# Altium PCB Anchor.PcbDoc
Units mm, origin at the board's own origin, x right, y up, seen from the top; angles counter-clockwise.
Board outline 60 x 60 mm, 4 copper layers (Top Layer, Layer 2, Layer 3, Bottom Layer), stack 0.568 mm thick; 43 components, 31 nets, 206 pads, 73 vias.
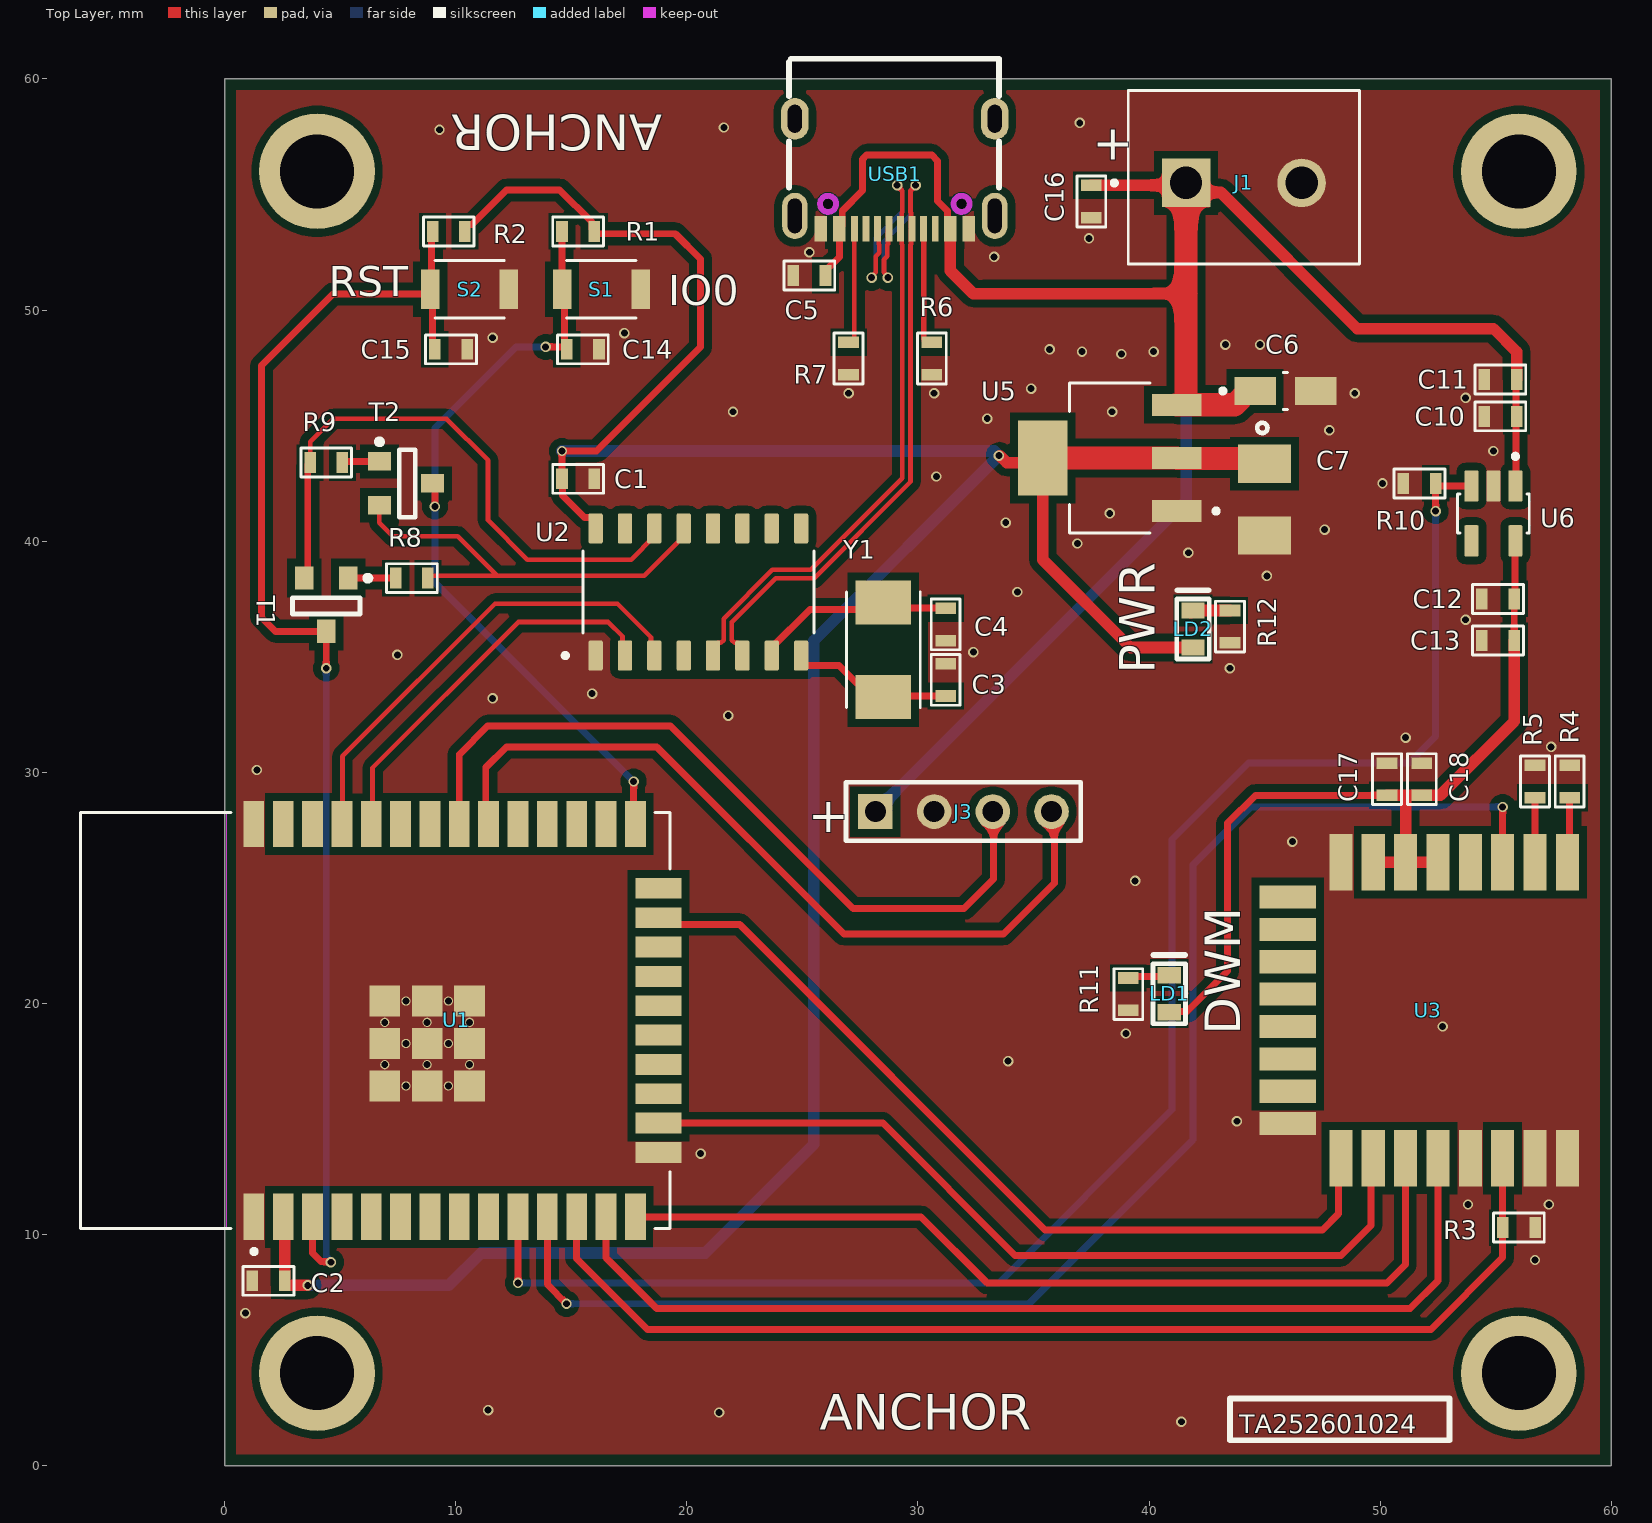
[diagram p0: Top Layer view]
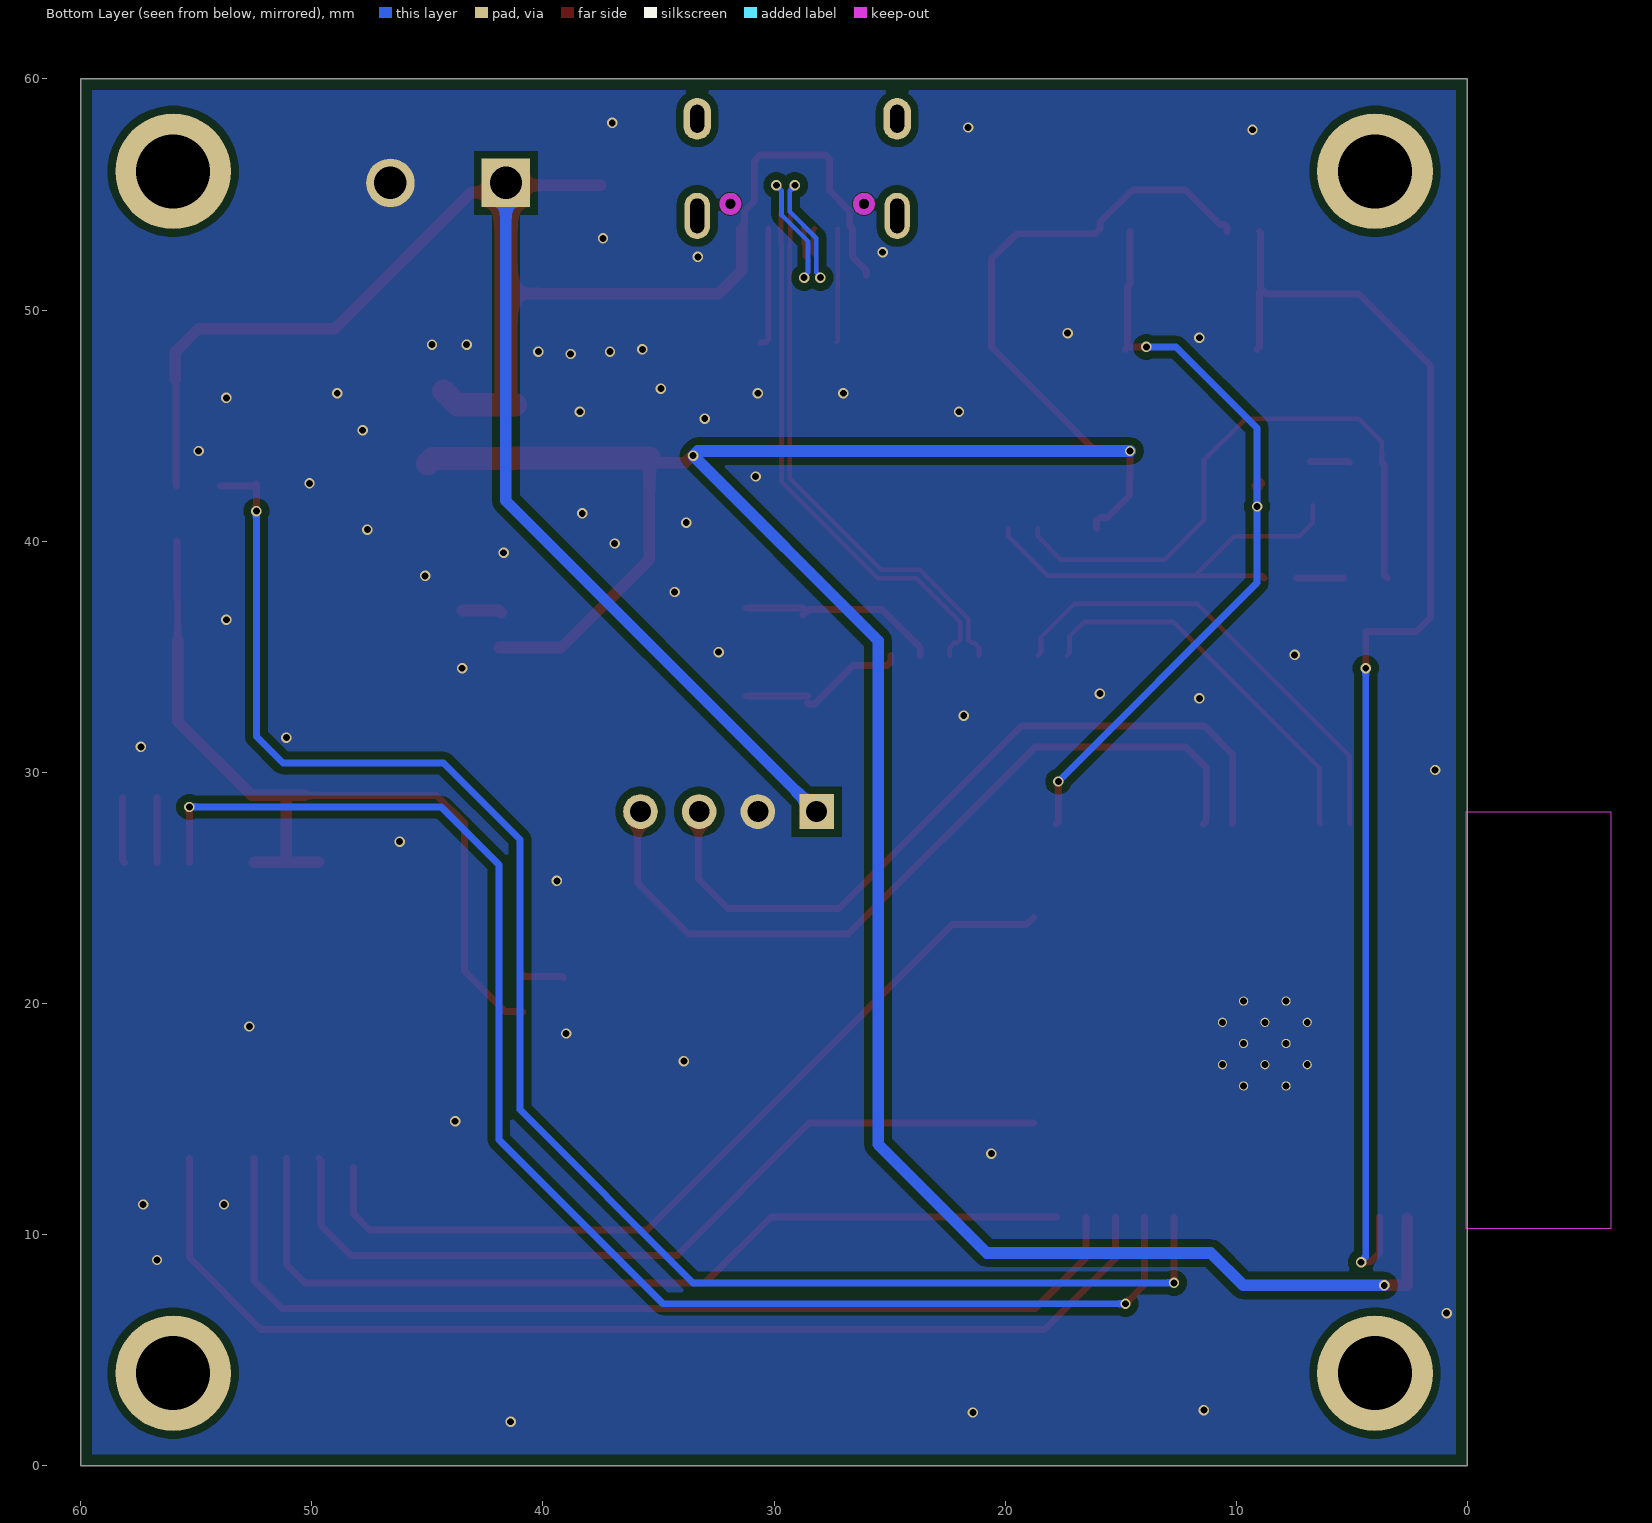
[diagram p1: Bottom Layer view, seen from below]
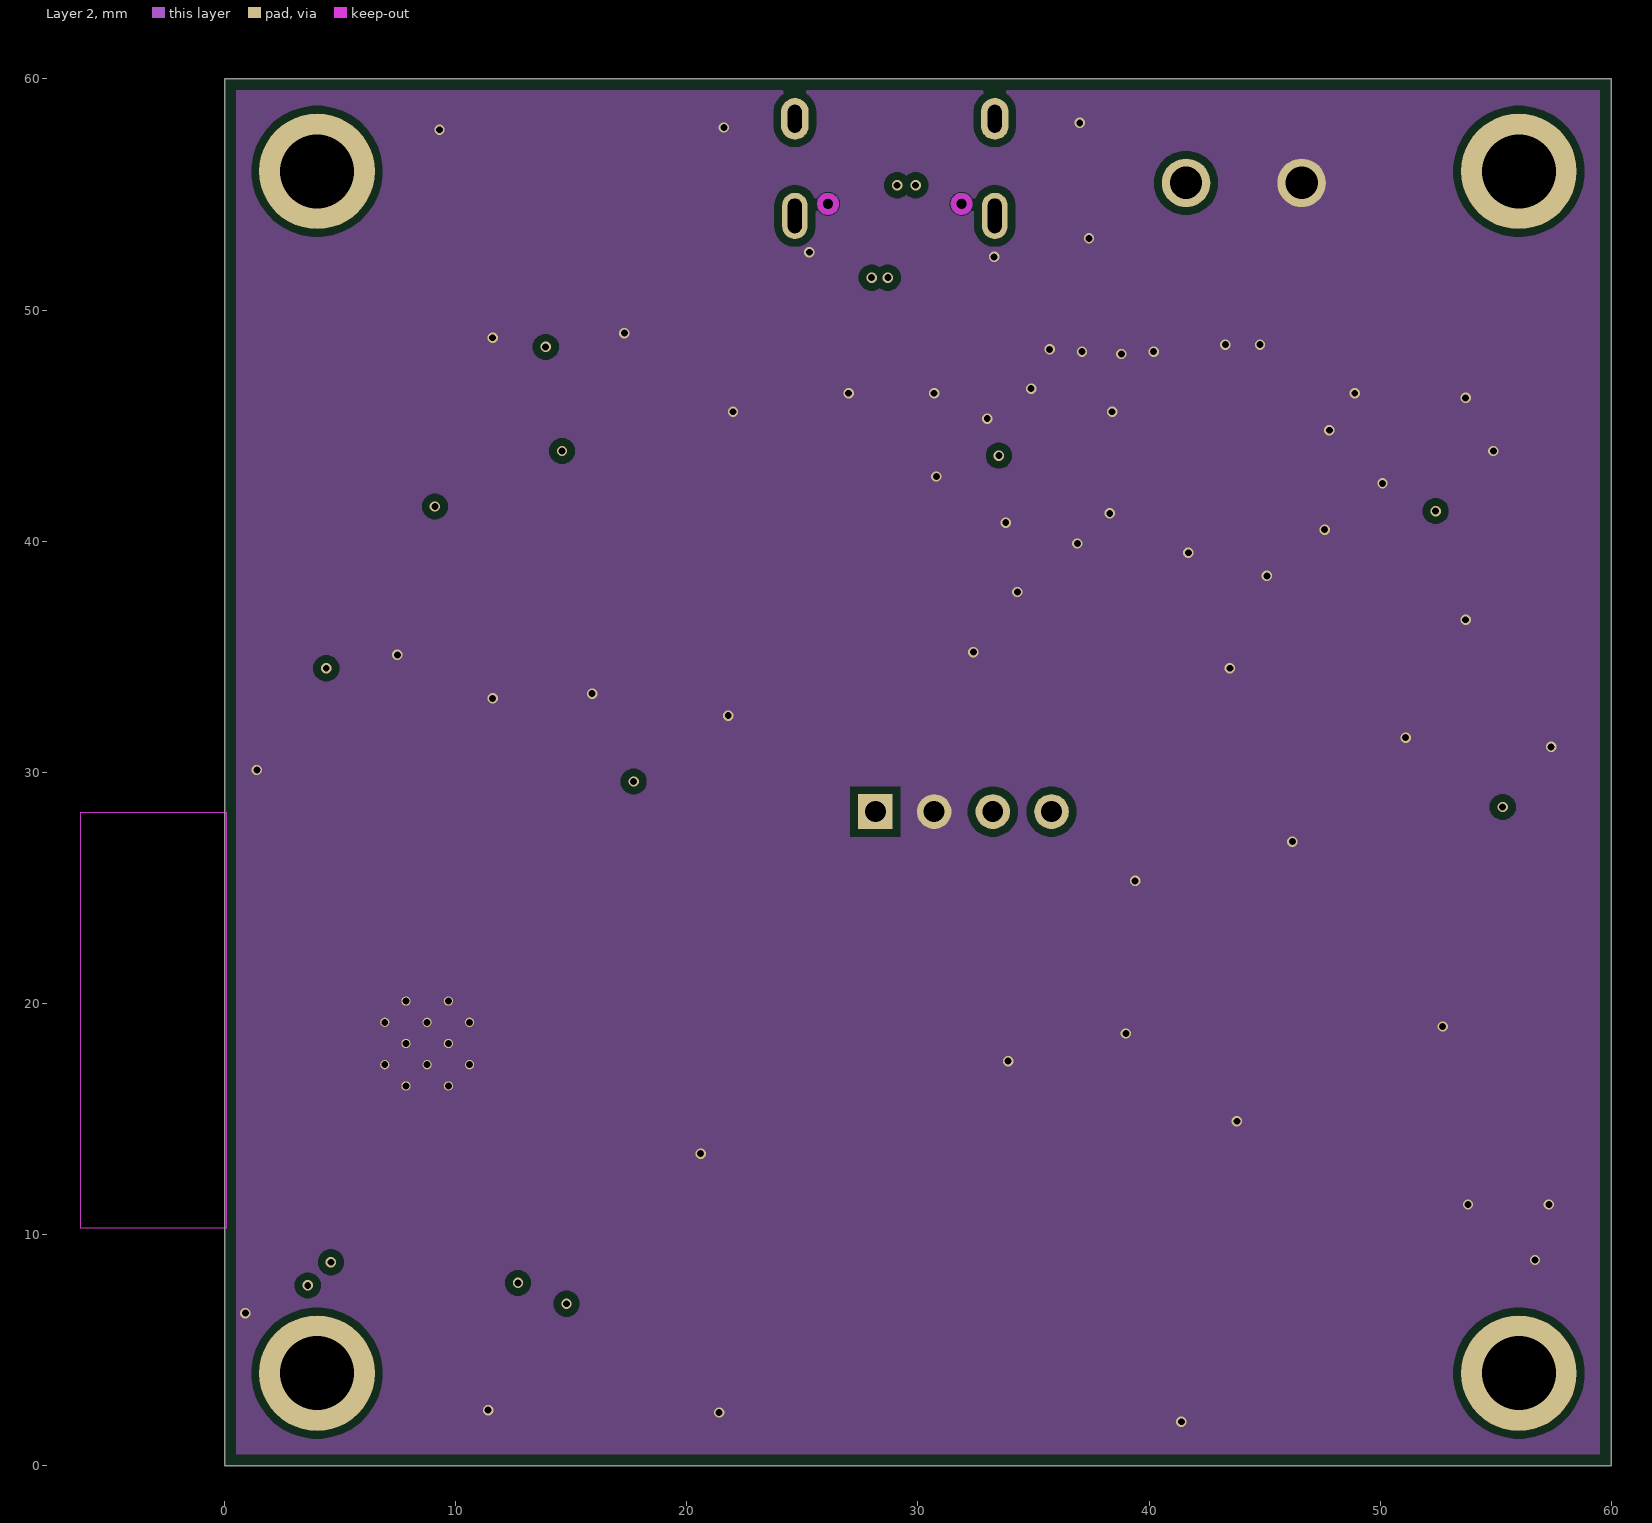
[diagram p2: Layer 2]
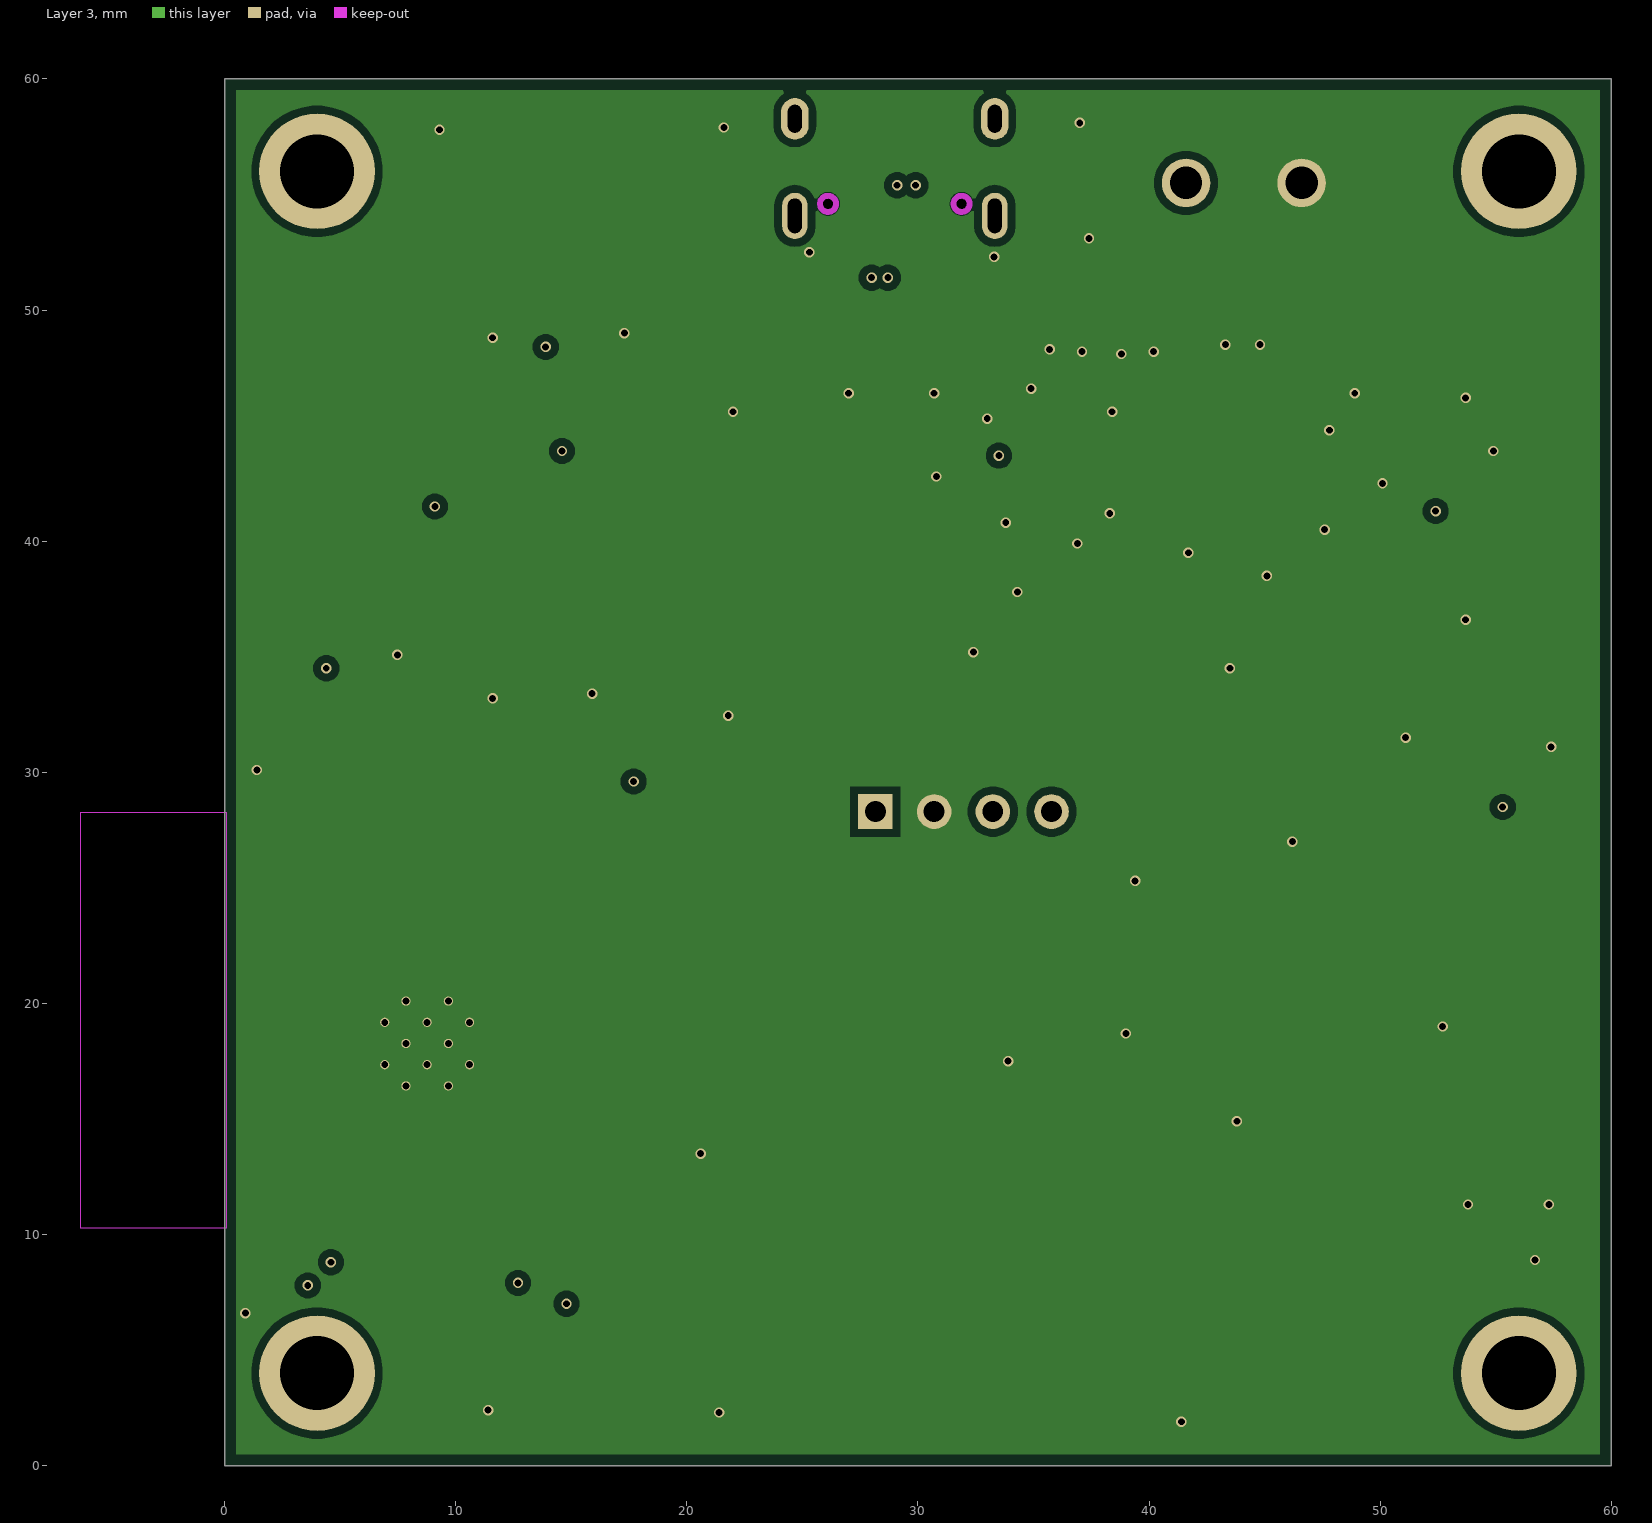
[diagram p3: Layer 3]
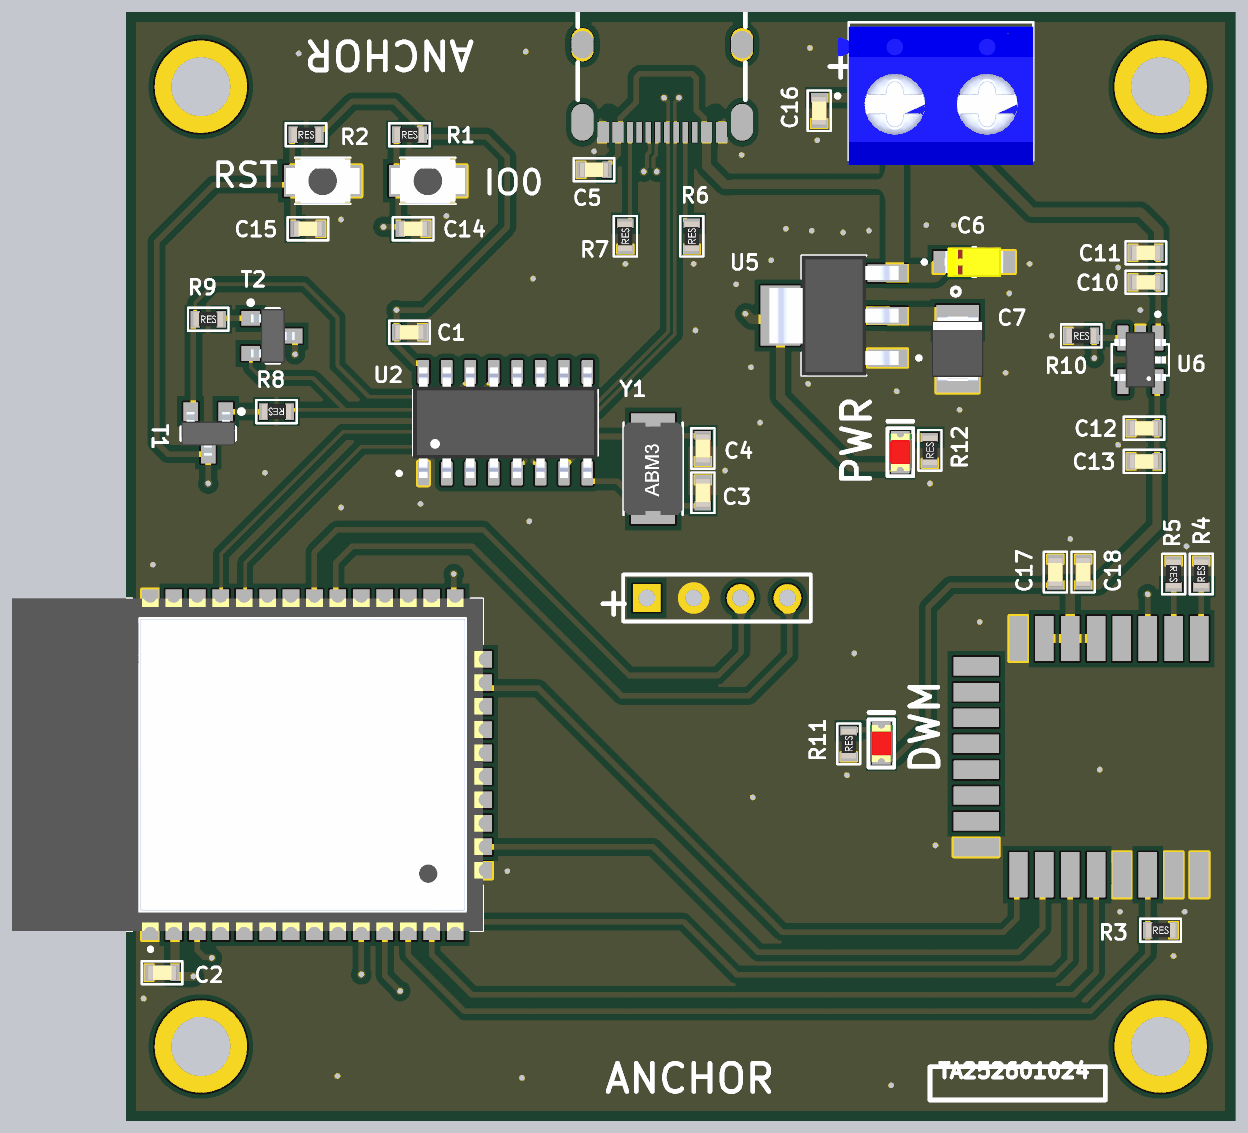
[diagram p4: 3D render of the assembled board from above, using the file's embedded part models]

## Layer stack, top to bottom
Top Solder: solder mask 0.0102, Solder Resist, Dk 3.5
Top Layer: signal copper 0.0356
Dielectric 2: prepreg 0.0711, PP-006, Dk 4.1
Layer 2: signal copper 0.0175
Dielectric 1: core 0.32, FR-4, Dk 4.8
Layer 3: signal copper 0.0175
Dielectric 3: prepreg 0.0711, PP-006, Dk 4.1
Bottom Layer: signal copper 0.0356
Bottom Solder: solder mask 0.0102, Solder Resist, Dk 3.5

## Board outline
0,0 0,60 60,60 60,0

## Design rules (kind name [scope] priority, off if disabled: settings)
Clearance [All] p1: gap=0.152 ignorepadtopadclearanceinfootprint=TRUE except(0: Arc-Hole Track-Hole SMDPad-Hole THPad-Hole Via-Hole Fill-Hole Poly-Hole Region-Hole Text-Hole; 0.254: Arc-Fill Arc-Text Track-Fill Track-Text SMDPad-Fill SMDPad-Text THPad-Fill THPad-Text Via-Fill Via-Text Fill-Fill Fill-Text Poly-Text Region-Text Text-Text; 0.33: Arc-Poly Track-Poly SMDPad-Poly THPad-Poly Via-Poly Fill-Poly Poly-Poly)
DiffPairsRouting [All] p1: maxlimit=0.254 minlimit=0.154 mostfreqgap=0.154 toplayer_minwidth=0.203 toplayer_maxwidth=0.381 toplayer_prefwidth=0.203 midlayer1_minwidth=0.203 midlayer1_maxwidth=0.381 midlayer1_prefwidth=0.203 midlayer2_minwidth=0.203 midlayer2_maxwidth=0.381 midlayer2_prefwidth=0.203 bottomlayer_minwidth=0.203 bottomlayer_maxwidth=0.381 bottomlayer_prefwidth=0.203 maxuncoupledlength=12.7
PolygonConnect [All] p1: connectstyle=Direct reliefconductorwidth=0.254 reliefentries=4 polygonreliefangle="90 Angle" airgapwidth=0.254
RoutingVias [All] p1: holewidth=0.711 width=1.27 viastyle="Through Hole" minholewidth=0.152 minwidth=0.16 maxholewidth=5 maxwidth=6
SolderMaskExpansion [All] p1: expansion=0.102 istentingtop=FALSE
Width [All] p1: maxlimit=2 minlimit=0.152 preferedwidth=0.5
29 further rules are at their usual default settings.

## Classes and differential pairs
component class Power: C6 C7 C10 C11 C12 C13 C16 J1 LD2 R10 R12 U5 U6
component class DWM_Display: C17 C18 J3 LD1 R3 R4 R5 R11 U3
component class Core: C1 C2 C3 C4 C5 C14 C15 R1 R2 R6 R7 R8 R9 S1 S2 T1 U1 U2 USB1 Y1
differential pair USB: +USB_P -USB_N

## Components (designator, comment, footprint, x,y, rotation, side; value= is the part's Value field where it differs from the comment)
C1 "100nF" 0603C 15.3,42.7 r0 top
C2 "100nF" 0603C 1.9,8 r0 top
C3 "10pF" 0603C 31.2,34 r270 top
C4 "10pF" 0603C 31.2,36.4 r90 top
C5 "100nF" 0603C 25.3,51.5 r0 top
C6 "10uF" CAPMP3216X180N 45.9,46.5 r0 top
C7 "22uF" CAPMP3528X210N 45,41.8 r270 top
C10 "10uF" 0603C 55.2,45.4 r0 top
C11 "100nF" 0603C 55.2,47 r0 top
C12 "10uF" 0603C 55.1,37.5 r0 top
C13 "100nF" 0603C 55.1,35.7 r0 top
C14 "10uF" 0603C 15.5,48.3 r180 top
C15 "10uF" 0603C 9.8,48.3 r180 top
C16 "10uF" 0603C 37.5,54.7 r90 top
C17 "100nF" 0603C 50.3,29.7 r270 top
C18 "10uF" 0603C 51.8,29.7 r270 top
J1 "KF301-2P" HANDSON_KF301-2P 44.1,55.5 r0 top
J3 "Header 4" HDR1X4 28.16,28.3 r0 top
LD1 "" "0603 LED" 40.874,20.42 r90 top
LD2 "" "0603 LED" 41.9,36.2 r90 top
R1 "10K" 0603R 15.3,53.4 r0 top
R2 "10K" 0603R 9.7,53.4 r0 top
R3 "10K" 0603R 56,10.3 r0 top
R4 "1K" 0603R 58.2,29.6 r90 top
R5 "1K" 0603R 56.7,29.6 r270 top
R6 "4K7" 0603R 30.6,47.9 r90 top
R7 "4K7" 0603R 27,47.9 r90 top
R8 "10K" 0603R 8.1,38.4 r180 top
R9 "10K" 0603R 4.4,43.4 r0 top
R10 "1K" 0603R 51.7,42.5 r0 top
R11 "2K" 0603R 39.1,20.4 r90 top
R12 "2K" 0603R 43.5,36.3 r90 top
S1 "B3U-1000PM" SW_B3U-1000PM 16.3,50.9 r0 top
S2 "B3U-1000PM" SW_B3U-1000PM 10.6,50.9 r0 top
T1 "S8050" SOT-23-3 4.4,37.2 r270 top
T2 "S8050" SOT-23-3 7.9,42.5 r0 top
U1 "ESP32-WROOM-32" MODULE_ESP32-WROOM-32 6.525,19.265 r90 top
U2 "CH340G" SOIC127P600X180-16N 20.5,37.8 r90 top
U3 "DWM1000" XCVR_DWM1000 56.3,19.7 r270 top
U5 "AMS1117IMP-3.3" VREG_LM1117IMP-3.3/NOPB 38.3,43.6 r180 top
U6 "AP2112K-3.3TRG1" SOT95P285X140-5N 54.9,41.2 r270 top
USB1 "TYPE-C 16PIN 2MD(073)" USB-C-SMD_TYPE-C-6PIN-2MD-073 29,55.9 r180 top
Y1 "ABM3-12.000MHZ" XTAL_ABM3-8.000MHZ-D2Y-T 28.5,35.3 r90 top

## Footprints (in the part's own frame and the unit in brackets; to place one, negate y for a bottom-side part, rotate by r counter-clockwise, add the part's x,y. Pads: shape width x height; smd on the part's side, far side on the other; paste and mask are expansions set on the pad)
"0603 LED" [mm]
  rect 0.7x1 smd mask+0.05: 1(0.8,0) 2(-0.8,0)
  silkscreen extent -1.3,-0.7 1.68,0.7, body extent -1.01,-0.63 1.01,0.62, height 1.1
0603C [mm]
  rect 0.5x0.9 smd mask+0.05: 1(-0.7,0) 2(0.7,0)
  silkscreen extent -1.1,-0.63 1.1,0.63, body extent -0.8,-0.41 0.8,0.41, height 0.57
0603R [mm]
  rect 0.5x0.9 smd mask+0.05: 1(-0.7,0) 2(0.7,0)
  silkscreen extent -1.1,-0.63 1.1,0.63, body extent -0.8,-0.4 0.8,0.4, height 0.3
CAPMP3216X180N [mm]
  rect 1.79x1.21 smd paste+0 mask+0.102: 1(-1.31,0) 2(1.31,0)
  silkscreen extent -2.8,-0.8 0.1,0.8, body extent -1.6,-0.8 1.6,0.8, height 1.8
CAPMP3528X210N [mm]
  rect 1.65x2.3 smd paste+0 mask+0.102: 1(-1.55,0) 2(1.55,0)
  silkscreen extent -3.32,-0.32 -2.88,0.12, body extent -1.75,-1.4 1.75,1.4, height 2.1
HANDSON_KF301-2P [mm]
  rect 2.1x2.1 / inner round 2.1 / far side rect 2.1x2.1 hole 1.4: 1(-2.5,0)
  round 2.1 hole 1.4: 2(2.5,0)
  silkscreen extent -5.7,-3.5 5,4, body extent -5.6,-3.75 5,3.75, height 10
HDR1X4 [mm] "Connector; Header; 4 Position"
  rect 1.5x1.5 hole 0.9: 1(0,0)
  round 1.5 hole 0.9: 2(2.54,0) 3(5.08,0) 4(7.62,0)
  silkscreen extent -1.27,-1.27 8.89,1.27
MODULE_ESP32-WROOM-32 [mm]
  rect 2x0.9 smd: 1(-8.5,5.26) 2(-8.5,3.99) 3(-8.5,2.72) 4(-8.5,1.45) 5(-8.5,0.18) 6(-8.5,-1.09) 7(-8.5,-2.36) 8(-8.5,-3.63) 9(-8.5,-4.9) 10(-8.5,-6.17) 11(-8.5,-7.44) 12(-8.5,-8.71) 13(-8.5,-9.98) 14(-8.5,-11.25) 25(8.5,-11.25) 26(8.5,-9.98) 27(8.5,-8.71) 28(8.5,-7.44) 29(8.5,-6.17) 30(8.5,-4.9) 31(8.5,-3.63) 32(8.5,-2.36) 33(8.5,-1.09) 34(8.5,0.18) 35(8.5,1.45) 36(8.5,2.72) 37(8.5,3.99) 38(8.5,5.26)
  rect 0.9x2 smd: 15(-5.715,-12.25) 16(-4.445,-12.25) 17(-3.175,-12.25) 18(-1.905,-12.25) 19(-0.635,-12.25) 20(0.635,-12.25) 21(1.905,-12.25) 22(3.175,-12.25) 23(4.445,-12.25) 24(5.715,-12.25)
  rect 1.33x1.33 smd: 39_1(-2.835,-0.405) 39_2(-1,-0.405) 39_3(0.835,-0.405) 39_4(-2.835,-2.24) 39_5(-1,-2.24) 39_6(0.835,-2.24) 39_7(-2.835,-4.075) 39_8(-1,-4.075) 39_9(0.835,-4.075)
  round 0.4 hole 0.3: 39_10(-1.917,-0.405) 39_11(-0.082,-0.405) 39_12(-2.835,-1.322) 39_13(-1,-1.322) 39_14(0.835,-1.322) 39_15(-1.917,-2.24) 39_16(-0.082,-2.24) 39_17(-2.835,-3.157) 39_18(-1,-3.157) 39_19(0.835,-3.157) 39_20(-1.917,-4.075) 39_21(-0.082,-4.075)
  Keep-Out Layer region: 9,6.45 -9,6.45 -9,12.75 9,12.75
  Keep-Out Layer region: 9,6.45 -9,6.45 -9,12.75 9,12.75
  silkscreen extent -10.1,-12.75 9,12.75, body extent -9,-12.75 9,12.75, height 3.2
SOIC127P600X180-16N [mm]
  rrect25% 1.31x0.62 smd: 1(-2.75,4.445) 2(-2.75,3.175) 3(-2.75,1.905) 4(-2.75,0.635) 5(-2.75,-0.635) 6(-2.75,-1.905) 7(-2.75,-3.175) 8(-2.75,-4.445) 9(2.75,-4.445) 10(2.75,-3.175) 11(2.75,-1.905) 12(2.75,-0.635) 13(2.75,0.635) 14(2.75,1.905) 15(2.75,3.175) 16(2.75,4.445)
  silkscreen extent -2.85,-5 1.78,5.85, body extent -3,-5 3,5, height 1.8
SOT95P285X140-5N [mm]
  rrect15% 1.35x0.6 smd: 1(-1.185,0.95) 2(-1.185,0) 3(-1.185,-0.95) 4(1.185,-0.95) 5(1.185,0.95)
  silkscreen extent -2.57,-1.55 0.85,1.55, body extent -1.5,-1.4 1.5,1.4, height 1.4
SOT-23-3 [mm]
  rect 1x0.8 smd: 1(-1.2,0.95) 2(-1.2,-0.95) 3(1.1,0)
  silkscreen extent -1.31,-1.46 0.35,1.91, body extent -1.18,-1.46 1.18,1.46, height 1.11
SW_B3U-1000PM [mm]
  rect 0.8x1.7 smd paste+0 mask+0.102: 1(-1.7,0) 2(1.7,0)
  silkscreen extent -1.5,-1.25 1.5,1.25, body extent -2,-1.25 2,1.25, height 1.75
USB-C-SMD_TYPE-C-6PIN-2MD-073 [mm]
  rect 0.55x1.1 smd paste-100 mask+0.05: 1(-3.2,2.375) 2(-2.4,2.375) 11(2.4,2.375) 12(3.2,2.375)
  rect 0.3x1.1 smd paste-100 mask+0.05: 3(-1.75,2.375) 4(-1.25,2.375) 5(-0.75,2.375) 6(-0.25,2.375) 7(0.25,2.375) 8(0.75,2.375) 9(1.25,2.375) 10(1.75,2.375)
  oval 1.2x1.8 hole 0.6 slot 1.2 at 90 deg paste+0 mask+0.05: 13(-4.325,-2.375) 14(4.325,-2.375)
  oval 1.1x2 hole 0.6 slot 1.5 at 90 deg paste+0 mask+0.05: 13(-4.325,1.825) 14(4.325,1.825)
  Keep-Out Layer board cut-out: 3.24,1.305 3.239,1.374 3.185,1.5 3.086,1.597 2.959,1.649 2.821,1.649 2.694,1.597 2.596,1.5 2.541,1.374 2.54,1.305 2.541,1.236 2.596,1.11 2.694,1.013 2.821,0.961 2.959,0.961 3.086,1.013 3.185,1.11 3.239,1.236 3.24,1.305
  Keep-Out Layer board cut-out: -2.54,1.305 -2.541,1.374 -2.595,1.5 -2.694,1.597 -2.821,1.649 -2.959,1.649 -3.086,1.597 -3.184,1.5 -3.239,1.374 -3.24,1.305 -3.239,1.236 -3.184,1.11 -3.086,1.013 -2.959,0.961 -2.821,0.961 -2.694,1.013 -2.595,1.11 -2.541,1.236 -2.54,1.305
  Keep-Out Layer circle w0.254: c2.89,1.305 r0.35
  Keep-Out Layer circle w0.025: c2.89,1.305 r0.35
  Keep-Out Layer circle w0.254: c-2.89,1.305 r0.35
  Keep-Out Layer circle w0.025: c-2.89,1.305 r0.35
  silkscreen extent -4.5,-4.97 4.57,0.6
VREG_LM1117IMP-3.3/NOPB [mm]
  rect 2.15x0.95 smd: 1(-2.9,2.3) 2(-2.9,0) 3(-2.9,-2.3)
  rect 2.15x3.25 smd: 4(2.9,0)
  silkscreen extent -4.7,-3.25 1.75,3.25, body extent -3.5,-3.25 3.5,3.25, height 1.8
XCVR_DWM1000 [mm]
  rect 2.45x1 smd: 1(-6.4,1.8) 2(-6.4,0.4) 3(-6.4,-1) 4(-6.4,-2.4) 5(-6.4,-3.8) 6(-6.4,-5.2) 7(-6.4,-6.6) 8(-6.4,-8) 17(6.4,-8) 18(6.4,-6.6) 19(6.4,-5.2) 20(6.4,-3.8) 21(6.4,-2.4) 22(6.4,-1) 23(6.4,0.4) 24(6.4,1.8)
  rect 1x2.45 smd: 9(-4.9,-10.295) 10(-3.5,-10.295) 11(-2.1,-10.295) 12(-0.7,-10.295) 13(0.7,-10.295) 14(2.1,-10.295) 15(3.5,-10.295) 16(4.9,-10.295)
XTAL_ABM3-8.000MHZ-D2Y-T [mm]
  rect 1.9x2.4 smd: 1(-2.05,0) 2(2.05,0)
  silkscreen extent -2.5,-1.6 2.5,1.6, body extent -2.5,-1.6 2.5,1.6, height 1.3

## Part data
C1 C2 C5 C10 C11 C12 C13 C16 C17 C18: library part "Capacitor - non polarized", "Non-polarised capacitor"
C3 C4 C14 C15: library part "Capacitor - non polarized_1", "Non-polarised capacitor"
C6: library part T543A106K010ATW080, "10 ÂµF Molded Tantalum Polymer Capacitor 10 V 1206 (3216 Metric) 80mOhm @ 100kHz", Package="SMD-2 Kemet", Check_prices=https://www.snapeda.com/parts/T543A106K010ATW080/Kemet/view-part/?ref=eda, MF=KEMET, MP=T543A106K010ATW080, SnapEDA_Link=https://www.snapeda.com/parts/T543A106K010ATW080/Kemet/view-part/?ref=snap
C7: library part TPSB226K016R0600, "Capacitor,Tantalum,Cap 22 uF,Tol 10%,Vol-Rtg 16 VDC,SMT,3528,ESR 600 mOhms,CT", Package="1210 AVX", Check_prices=https://www.snapeda.com/parts/TPSB226K016R0600/AVX/view-part/?ref=eda, MF=AVX, MP=TPSB226K016R0600, SnapEDA_Link=https://www.snapeda.com/parts/TPSB226K016R0600/AVX/view-part/?ref=snap
J1: "2 Pin Terminal Block 5mm Pitch", Package=None, Check_prices=https://www.snapeda.com/parts/KF301-2P/Handson+Technology/view-part/?ref=eda, MF="Handson Technology", MP=KF301-2P, SnapEDA_Link=https://www.snapeda.com/parts/KF301-2P/Handson+Technology/view-part/?ref=snap
J3: "Header, 4-Pin", LatestRevisionDate=17-Jul-2002, LatestRevisionNote="Re-released for DXP Platform.", Publisher="Altium Limited"
LD1 LD2: library part "LED Red 1C 2A", "LED Red 1C 2A"
R1 R2 R3 R4 R5 R6 R7 R8 R9 R10 R11 R12: library part "Resistor - 1%_1", "Resistor - 1%"
S1 S2: "Top, w/o Boss 1k Reel", Package="Custom Package Omron", Check_prices=https://www.snapeda.com/parts/B3U-1000PM/Omron/view-part/?ref=eda, MF=Omron, MP=B3U-1000PM, SnapEDA_Link=https://www.snapeda.com/parts/B3U-1000PM/Omron/view-part/?ref=snap
T1 T2: library part "NPN B1 E2 C3", "NPN Transistor"
U1: "Bluetooth, WiFi 802.11b/g/n, Bluetooth v4.2 +EDR, Class 1, 2 and 3 Transceiver Module 2.4GHz ~ 2.5GHz Antenna Not Included, U.FL Surface Mount", Package="Module Espressif Systems", Availability="In Stock", Check_prices=https://www.snapeda.com/parts/ESP32-WROOM-32/Espressif+Systems/view-part/?ref=eda, MF="Espressif Systems", MP=ESP32-WROOM-32, Price=None, Purchase-URL=https://pricing.snapeda.com/search/part/ESP32-WROOM-32/?ref=eda, SnapEDA_Link=https://www.snapeda.com/parts/ESP32-WROOM-32/Espressif+Systems/view-part/?ref=snap
U2: "USB Interface Integrated Circuit", Package=None, Availability="Not in stock", Check_prices=https://www.snapeda.com/parts/Ch340G/WCH/view-part/?ref=eda, MF=WCH, MP=Ch340G, Price=None, SnapEDA_Link=https://www.snapeda.com/parts/Ch340G/WCH/view-part/?ref=snap
U3: "802.15.4 IR-UWB Transceiver Module 3.5GHz ~ 6.5GHz Integrated, Chip Surface Mount", Package="Module Decawave", Availability=Unavailable, MF="Decawave Limited", MP=DWM1000, Price=None, SnapEDA_Link=https://www.snapeda.com/parts/DWM1000/Decawave%20Limited/view-part/327593/?ref=snap
U5: library part LM1117IMP-3.3, "800mA Low-Dropout Linear Regulator, 4-pin SOT-223", Manufacturer="National Semiconductor", PackageTopMarking=XYTT*N05B, PowerWise=N, Code_IPC=SOT223-4, Code_JEDEC=TO-261-AA, ComponentLink1Description="Manufacturer URL", ComponentLink1URL=http://www.national.com/, ComponentLink2Description="LM1117 Datasheet", ComponentLink2URL=http://www.national.com/ds/LM/LM1117.pdf, ComponentLink3Description="LM1117 Web Page", ComponentLink3URL=http://www.national.com/pf/LM/LM1117.html, ComponentLink4Description="MP04A Package Page", ComponentLink4URL=http://www.national.com/packaging/folders/mp04a.html, CompType="LDO IC", DatasheetVersion=Apr-2006, High-Reliability=Y, PackageDescription="Molded SOT-223, 6.50 x 3.56 x 1.6mm Body, 4 Lead, 2.3mm Pitch", PackageReference=MP04A, PackageVersion="revB, Apr-2003", PartNumber=LM1117IMP-3.3, PinCount=4, RoHS=N
U6: "Linear Voltage Regulator IC Positive Fixed 1 Output 600mA SOT-25", Package="SOT-753 Diodes Inc.", Availability="In Stock", Check_prices=https://www.snapeda.com/parts/AP2112K-3.3TRG1/Diodes+Inc./view-part/?ref=eda, MF="Diodes Inc.", MP=AP2112K-3.3TRG1, Price=None, Purchase-URL=https://pricing.snapeda.com/search/part/AP2112K-3.3TRG1/?ref=eda, SnapEDA_Link=https://www.snapeda.com/parts/AP2112K-3.3TRG1/Diodes+Inc./view-part/?ref=snap
USB1: JLCPCB Part Class="Extended Part", Manufacturer="SHOU HAN(首韩)", Contributor=LCSC, Manufacturer Part="TYPE-C 16PIN 2MD(073)", spicePre=U, spiceSymbolName="TYPE-C 16PIN 2MD(073)", Supplier=LCSC, Supplier Part=C2765186
Y1: library part ABM3-8.000MHZ-D2Y-T, "8 MHz Â±20ppm Crystal 18pF 140 Ohms 2-SMD, No Lead", Package="SMD-2 Abracon", Availability="In Stock", Check_prices=https://www.snapeda.com/parts/ABM3-8.000MHZ-D2Y-T/Abracon+LLC/view-part/?ref=eda, MF=Abracon, MP=ABM3-8.000MHZ-D2Y-T, Price=None, Purchase-URL=https://pricing.snapeda.com/search/part/ABM3-8.000MHZ-D2Y-T/?ref=eda, SnapEDA_Link=https://www.snapeda.com/parts/ABM3-8.000MHZ-D2Y-T/Abracon+LLC/view-part/?ref=snap

## Free pads (board coordinates)
  round 5 hole 3.2 mask+0.102: 14(4,4) 14(4,56) 14(56,4) 14(56,56)

## Via types
v1: diameter 0.45, hole 0.3, Top Layer to Bottom Layer, tented both sides, 73 vias

## Nets (pads, with @x,y where several pads share a name; then routed paths per layer and width w, separated by ;. In a path a pad name is that pad's centre, name@x,y a point inside that pad or via, vN(x,y) a via of type N, cw(c..) or ccw(c..) an arc to the next point about the centre after c; other vN are vias at no path point)
3V3: C1.1 C2.2 C7.1 LD2.2 R1.2 R2.2 U1.2 U2.16 U5.2 U5.4 | length 133.1
  Top Layer w0.3: U1.2 U1.2@2.6,10.7 ; R2.2 10.4,53.6 10.5,53.7 10.7,53.7 12.2,55.2 14.5,55.2 15.9,53.8 15.9,53.5 R1.2 16.1,53.3 19.5,53.3 20.6,52.2 20.6,48.4 16.1,43.9 v1(14.6,43.9) C1.1 14.621,42.679 14.621,41.984 15.577,41.028 15.895,41.028 16.055,40.868 U2.16 ; v1(33.5,43.7) v1@33.541,43.7 ; U5.4@35.2,43.4 U5.4
  Top Layer w0.5: U1.2@2.6,10.7 C2.2 2.6,7.8 v1(3.6,7.8) ; v1@33.541,43.7 33.841,43.4 U5.4@35.2,43.4 ; U5.4 35.4,39.2 39.2,35.4 LD2.2
  Top Layer w1: U5.4 U5.2 41.225,43.575 44.775,43.575 C7.1
  Bottom Layer w0.5: v1(3.6,7.8) 9.7,7.8 11.1,9.2 20.8,9.2 25.5,13.9 25.5,35.7 v1(33.5,43.7) 33.3,43.9 v1(14.6,43.9)
3V3_DWM: C12.2 C13.2 C17.2 C18.2 LD1.2 U3.5 U3.6 U3.7 U6.5 | length 37.4
  Top Layer w0.3: LD1.2 40.902,19.648 41.648,19.648 43.4,21.4 43.4,27.8 44.6,29 C17.2 ; C13.2 C12.2 55.825,37.525 55.825,39.99 U6.5
  Top Layer w0.5: U3.7 U3.6 ; C17.2 51.05,29 ; U3.5 U3.6 ; C13.2 55.8,32.2 52.6,29 C18.2 51.05,29 ; 51.05,29 51.1,28.95 U3.6
5V: C5.2 C6.1 C10.2 C11.2 C16.2 J1.1 J3.1 U5.3 U6.1 USB1.2 USB1.11 | length 97.7
  Top Layer w0.3: C5.2 26,51.7 26.6,52.3 USB1.11 26.725,53.65 26.725,54.293 27.6,55.169 27.6,56.524 27.776,56.7 30.6,56.7 30.851,56.449 30.851,54.718 31.275,54.293 31.275,53.65 USB1.2 ; U6.1 55.875,42.41 55.875,45.4 55.875,46.975 C11.2
  Top Layer w0.5: USB1.2 31.4,51.7 32.393,50.707 32.807,50.707 32.812,50.712 41.6,50.712 ; C16.2 41.5,55.4 J1.1 42.007,55.093 43.107,55.093 49,49.2 54.9,49.2 55.9,48.2 C11.2 ; C6.1@44.3,46.5 C6.1@44.4,46.6
  Top Layer w1: U5.3 U5.3@41.575,45.9 ; J1.1 41.6,55.1 41.6,50.712 41.6,45.925 U5.3@41.575,45.9 ; C6.1@44.3,46.5 43.7,45.9 U5.3@41.575,45.9
  Bottom Layer w0.5: J3.1@28.317,28.457 41.6,41.74 J1.1
GND: C1.2 C2.1 C3.1 C4.1 C5.1 C6.2 C7.2 C10.1 C11.1 C12.1 C13.1 C14.1 C15.1 C16.1 C17.1 C18.1 J1.2 J3.2 R3.2 R4.2 R5.1 R6.1 R7.1 R10.1 R11.1 R12.1 S1.2 S2.2 U1.1 U1.15 U1.38 U1.39_1 U1.39_2 U1.39_3 U1.39_4 U1.39_5 U1.39_6 U1.39_7 U1.39_8 U1.39_9 U1.39_10 U1.39_11 U1.39_12 U1.39_13 U1.39_14 U1.39_15 U1.39_16 U1.39_17 U1.39_18 U1.39_19 U1.39_20 U1.39_21 U2.1 U3.8 U3.16 U3.21 U3.23 U3.24 U5.1 U6.2 USB1.1 USB1.12
  other v1: 41.4,1.9 21.4,2.3 11.4,2.4 0.9,6.6 56.7,8.9 53.8,11.3 57.3,11.3 20.6,13.5 43.8,14.9 33.9,17.5 39,18.7 52.7,19 39.4,25.3 46.2,27 1.4,30.1 57.4,31.1 51.1,31.5 21.793,32.455 11.6,33.2 15.9,33.4 43.5,34.5 7.476,35.081 32.4,35.2 53.7,36.6 34.3,37.8 45.1,38.5 41.7,39.5 36.9,39.9 47.6,40.5 33.8,40.8 38.3,41.2 50.1,42.5 30.8,42.8 54.9,43.9 47.8,44.8 33,45.3 22,45.6 38.4,45.6 53.7,46.2 27,46.4 30.7,46.4 48.9,46.4 34.9,46.6 38.8,48.1 37.1,48.2 40.2,48.2 35.7,48.3 43.3,48.5 44.8,48.5 11.6,48.8 17.3,49 33.3,52.3 25.3,52.5 37.4,53.1 9.3,57.8 21.6,57.9 37,58.1
NetC3_2: C3.2 U2.8 Y1.1 | length 7.3
  Top Layer w0.3: U2.8 24.945,34.783 25.105,34.623 26.577,34.623 28.25,32.95 28.5,32.95 Y1.1@28.55,33 ; Y1.1@28.55,33.3 C3.2
NetC4_2: C4.2 U2.7 Y1.2 | length 8.7
  Top Layer w0.3: U2.7 23.675,35.395 25.33,37.05 28.5,37.05 Y1.2@28.75,36.8 ; Y1.2@28.75,37.1 C4.2
NetC14_2: C14.2 R1.1 S1.1 T2.3 U1.25 | length 34
  Top Layer w0.3: v1(9.1,41.5) T2.3@9.1,42.4 ; v1(13.895,48.405) C14.2@14.7,48.405 ; R1.1 14.6,51.1 14.7,51 C14.2@14.7,48.405 ; C14.2 14.8,48.305 C14.2@14.7,48.405 ; v1(17.7,29.6) 17.7,27.84 U1.25
  Top Layer w0.5: T2.3 T2.3@9.1,42.4
  Bottom Layer w0.3: v1@13.9,48.4 12.6,48.4 9.1,44.9 v1(9.1,41.5) 9.1,38.2 v1(17.7,29.6)
NetC15_2: C15.2 R2.1 S2.1 T1.3 U1.3 | length 57.8
  Top Layer w0.3: U1.3 3.805,9.195 4.171,8.829 4.571,8.829 v1(4.6,8.8) ; v1(4.4,34.5) T1.3 2.2,36.1 1.6,36.7 1.6,47.6 4.7,50.7 8.7,50.7 S2.1 ; R2.1 8.95,53.35 8.95,50.95 S2.1 ; C15.2 9,48.4 9,50.8 S2.1
  Bottom Layer w0.3: v1(4.4,34.5) 4.4,9.041 4.6,8.841 v1(4.6,8.8)
NetJ3_3: J3.3 U1.31 | length 32.9
  Top Layer w0.3: U1.31 10.155,30.779 11.376,32 19.3,32 27.2,24.1 32,24.1 33.277,25.377 J3.3@33.277,27.878
NetJ3_4: J3.4 U1.30 | length 34.7
  Top Layer w0.3: U1.30 11.3,27.89 11.3,30.2 12.2,31.1 18.7,31.1 26.8,23 33.7,23 35.9,25.2 J3.4@35.9,28.164
NetLD1_1: LD1.1 R11.2 | length 1.8
  Top Layer w0.3: R11.2 39.16,21.16 40.814,21.16 LD1.1
NetLD2_1: LD2.1 R12.2 | length 1.7
  Top Layer w0.5: LD2.1@41.8,36.9 LD2.1 R12.2
NetR3_1: R3.1 U1.12 U3.22 | length 48.7
  Top Layer w0.3: U1.12 15.235,8.965 18.3,5.9 52.2,5.9 55.3,9 R3.1 U3.22
NetR4_1: R4.1 U3.1 | length 2.8
  Top Layer w0.3: U3.1 58.2,26.2 R4.1
NetR5_2: R5.2 U3.2 | length 2.8
  Top Layer w0.3: U3.2 R5.2
NetR6_2: R6.2 USB1.4 | length 5.2
  Top Layer w0.25: USB1.4 30.25,48.725 30.375,48.6 R6.2
NetR7_2: R7.2 USB1.10 | length 4.9
  Top Layer w0.2: USB1.10 27.25,48.65 R7.2@27.3,48.6
NetR8_1: R8.1 T2.2 U2.13 | length 19
  Top Layer w0.2: T2.2 6.7,40.8 7.284,40.216 10.084,40.216 11.8,38.5 ; R8.1@8.9,38.5 11.8,38.5 ; U2.13 19.865,40.205 18.16,38.5 11.8,38.5
  Top Layer w0.3: R8.1 R8.1@8.9,38.5
NetR8_2: R8.2 T1.1 | length 2.1
  Top Layer w0.3: T1.1 R8.2
NetR9_1: R9.1 T1.2 U2.14 | length 26.1
  Top Layer w0.2: R9.1 3.7,44.3 4.7,45.3 9.6,45.3 11.4,43.5 11.4,40.9 13.1,39.2 17.59,39.2 18.595,40.205 U2.14
  Top Layer w0.3: T1.2 3.6,38.55 3.6,43.3 R9.1
NetR9_2: R9.2 T2.1 | length 1.7
  Top Layer w0.3: R9.2 5.15,43.45 T2.1@6.8,43.45
NetR10_2: R10.2 U1.10 U6.3 | length 71.7
  Top Layer w0.3: U1.10 v1(12.695,7.905) v1@12.7,7.9 ; v1(52.4,41.3) 52.4,42.485 52.5,42.385 U6.3
  Bottom Layer w0.3: v1(12.695,7.905) 33.505,7.905 41,15.4 41,27.1 44.3,30.4 51.251,30.4 52.4,31.549 v1(52.4,41.3)
NetU1_11: U1.11 U3.3 | length 62.9
  Top Layer w0.3: U1.11 13.965,7.835 v1@14.8,7 ; U3.3 v1(55.3,28.5)
  Bottom Layer w0.3: v1(14.795,7.005) 34.805,7.005 41.9,14.1 41.9,26 44.4,28.5 v1(55.3,28.5)
NetU1_13: U1.13 U3.20 | length 44.5
  Top Layer w0.3: U1.13 16.505,8.995 18.7,6.8 51.3,6.8 52.5,8 U3.20
NetU1_14: U1.14 U3.19 | length 39.4
  Top Layer w0.3: U1.14 30.135,10.765 33,7.9 50.3,7.9 51.1,8.7 U3.19
NetU1_16: U1.16 U3.18 | length 36.7
  Top Layer w0.3: U1.16 28.48,14.82 34.2,9.1 48.3,9.1 49.6,10.4 49.6,13.2 U3.18
NetU1_23: U1.23 U3.17 | length 37.3
  Top Layer w0.3: U1.23 19.075,23.41 22.29,23.41 35.5,10.2 47.5,10.2 48.2,10.9 U3.17@48.2,12.9
NetU1_34: U1.34 U2.2 | length 17
  Top Layer w0.2: U1.34 6.4,27.82 6.4,30.2 12.7,36.5 16.6,36.5 17.216,35.884 17.216,35.159 U2.2
NetU1_35: U1.35 U2.3 | length 20.5
  Top Layer w0.2: U1.35 5.1,27.79 5.1,30.7 11.7,37.3 17,37.3 18.451,35.849 18.451,35.194 U2.3
USB_N: U2.6 USB1.5 USB1.7 | length 31.9
  Top Layer w0.203: U2.6 22.405,35.395 22.197,35.604 22.067,35.604 21.948,35.722 21.948,36.501 23.848,38.4 25.505,38.4 29.678,42.574 29.678,52.823 29.701,52.846 29.701,53.476 USB1.5 29.701,53.573 29.701,54.204 29.678,54.227 29.678,54.725 29.679,55.158 29.9,55.379 v1(29.9,55.4) ; v1(28.7,51.4) 28.7,51.467 28.529,51.638 28.529,52.177 28.678,52.327 28.678,52.823 28.701,52.846 28.701,53.476 USB1.7
  Bottom Layer w0.203: v1(28.7,51.4) 28.7,51.467 28.529,51.638 28.529,52.966 29.679,54.116 29.679,55.158 29.9,55.379 v1(29.9,55.4)
USB_P: U2.5 USB1.6 USB1.8 | length 31.9
  Top Layer w0.203: U2.5 21.135,35.395 21.343,35.604 21.473,35.604 21.591,35.722 21.591,36.648 23.7,38.757 25.357,38.757 29.321,42.721 29.321,52.823 29.299,52.846 29.299,53.476 USB1.6 29.299,53.573 29.299,54.204 29.321,54.227 29.321,54.873 29.322,55.158 29.1,55.379 v1(29.1,55.4) ; v1(28,51.4) 28,51.467 28.172,51.638 28.172,52.325 28.321,52.475 28.321,52.823 28.299,52.846 28.299,53.476 USB1.8
  Bottom Layer w0.203: v1(28,51.4) 28,51.467 28.172,51.638 28.172,53.114 29.322,54.264 29.322,55.158 29.1,55.379 v1(29.1,55.4)
pads on no net: U1.4 U1.5 U1.6 U1.7 U1.8 U1.9 U1.17 U1.18 U1.19 U1.20 U1.21 U1.22 U1.24 U1.26 U1.27 U1.28 U1.29 U1.32 U1.33 U1.36 U1.37 U2.4 U2.9 U2.10 U2.11 U2.12 U2.15 U3.4 U3.9 U3.10 U3.11 U3.12 U3.13 U3.14 U3.15 U6.4 USB1.3 USB1.9 USB1.13 USB1.14

## Polygon pours and split planes (outlines as drawn)
GND on Layer 2 "GND_L02_P002" (solid, pour order 2): 0.5,59.5 59.5,59.5 59.5,0.5 0.5,0.5
GND on Layer 3 "GND_L03_P003" (solid, pour order 3): 0.5,59.5 59.5,59.5 59.5,0.5 0.5,0.5
GND on Top Layer "GND_L01_P000" (solid, pour order 0): 0.5,59.5 59.5,59.5 59.5,0.5 0.5,0.5
GND on Bottom Layer "GND_L04_P001" (solid, pour order 1): 0.5,59.5 59.5,59.5 59.5,0.5 0.5,0.5

## Other copper
Top Layer:
  pour cut-out: 15.471,39.765 15.519,39.814 25.561,39.814 25.561,34.291 25.327,34.057 17.093,34.057 17.093,36.293 17.1,36.3 15.6,36.3
  pour cut-out: 30.42,36.611 30.42,33.789 30.076,34.133 25.403,34.133 25.403,36.703 25.5,36.8
  pour cut-out: 28.089,56.211 30.361,56.211 30.361,54.2 27.6,54.2 27.6,56.2

## Silkscreen, mask and mechanical layers (free items; w line width, h text height)
Top Overlay:
  lines w0.254: 43.5,1.1 53,1.1 53,2.9 43.5,2.9 43.5,1.1
  text "ANCHOR" at 18.946,58.446 h1.52 r180
  text "+" at 37.554,56.5 h1.52
  text "RST" at 4.5,50.6 h1.3
  text "IO0" at 19.2,50.2 h1.3
  text "PWR" at 40.246,34.254 h1.52 r90
  text "+" at 25.254,27.4 h1.52
  text "DWM" at 43.946,18.654 h1.52 r90
  text "ANCHOR" at 25.754,1.554 h1.52
  text "TA252601024" at 43.9,1.4 h0.8
Board:
  the board outline again, w0.1

## Text inside footprints (layer, text, board x,y; h text height)
U1: Mechanical 13 "ANTENNA" at -2.475,13.265 h1.78 r90